# Altium PCB SoderStation.PcbDoc
Units mm, origin at the board's own origin, x right, y up, seen from the top; angles counter-clockwise.
Board outline 100 x 50 mm, 2 copper layers (Top Layer, Bottom Layer); 48 components, 33 nets, 146 pads, 5 vias.
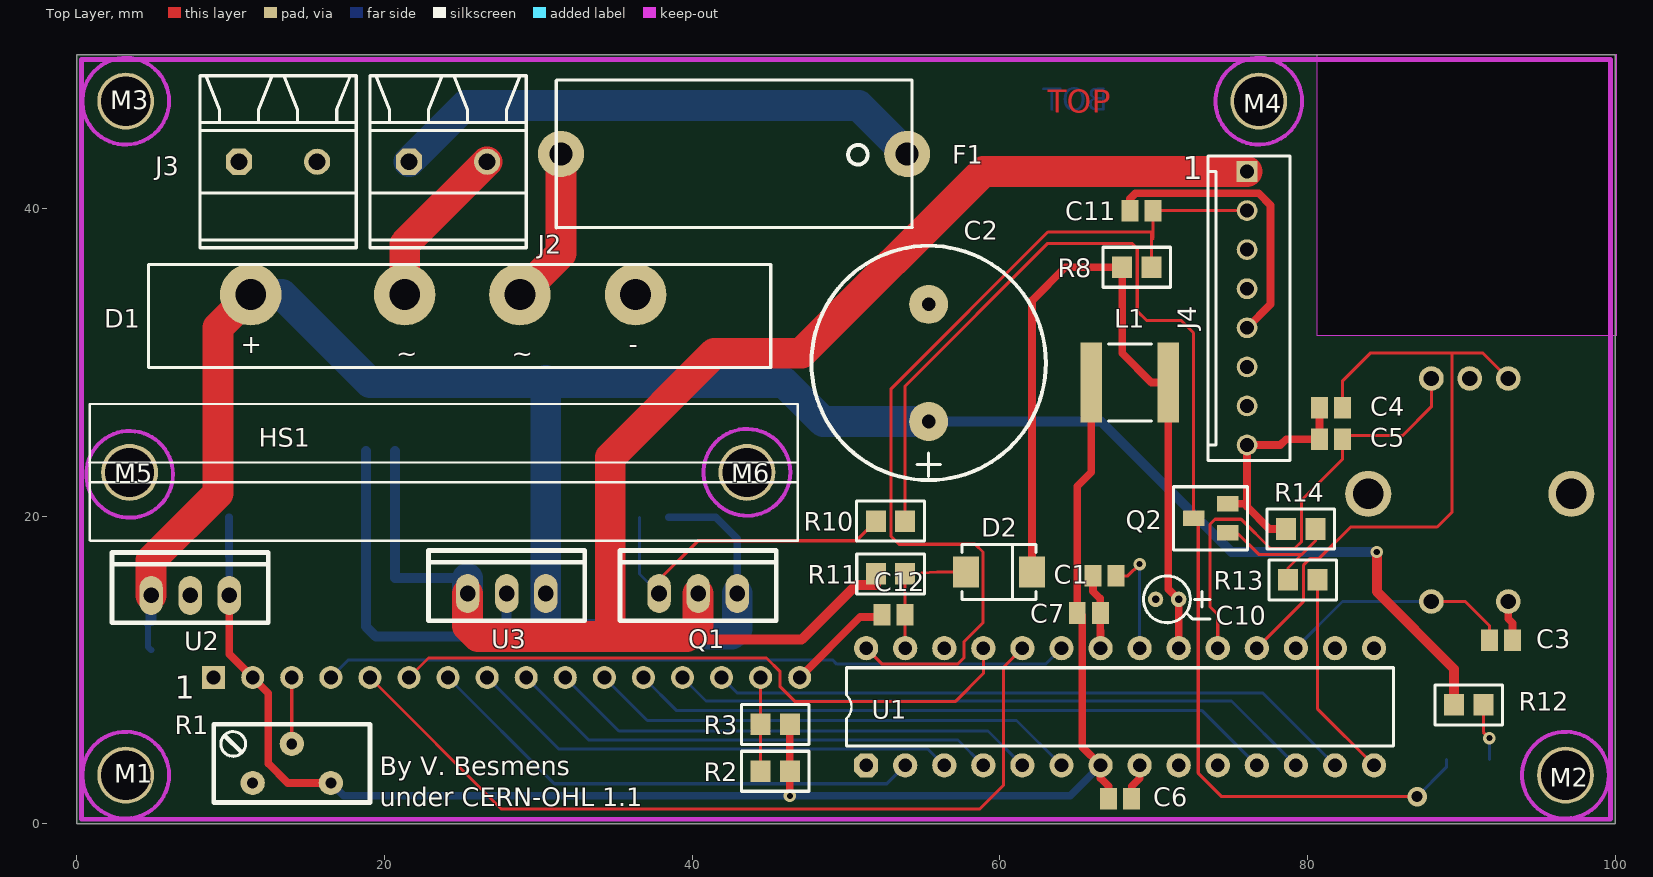
[diagram p0: Top Layer view]
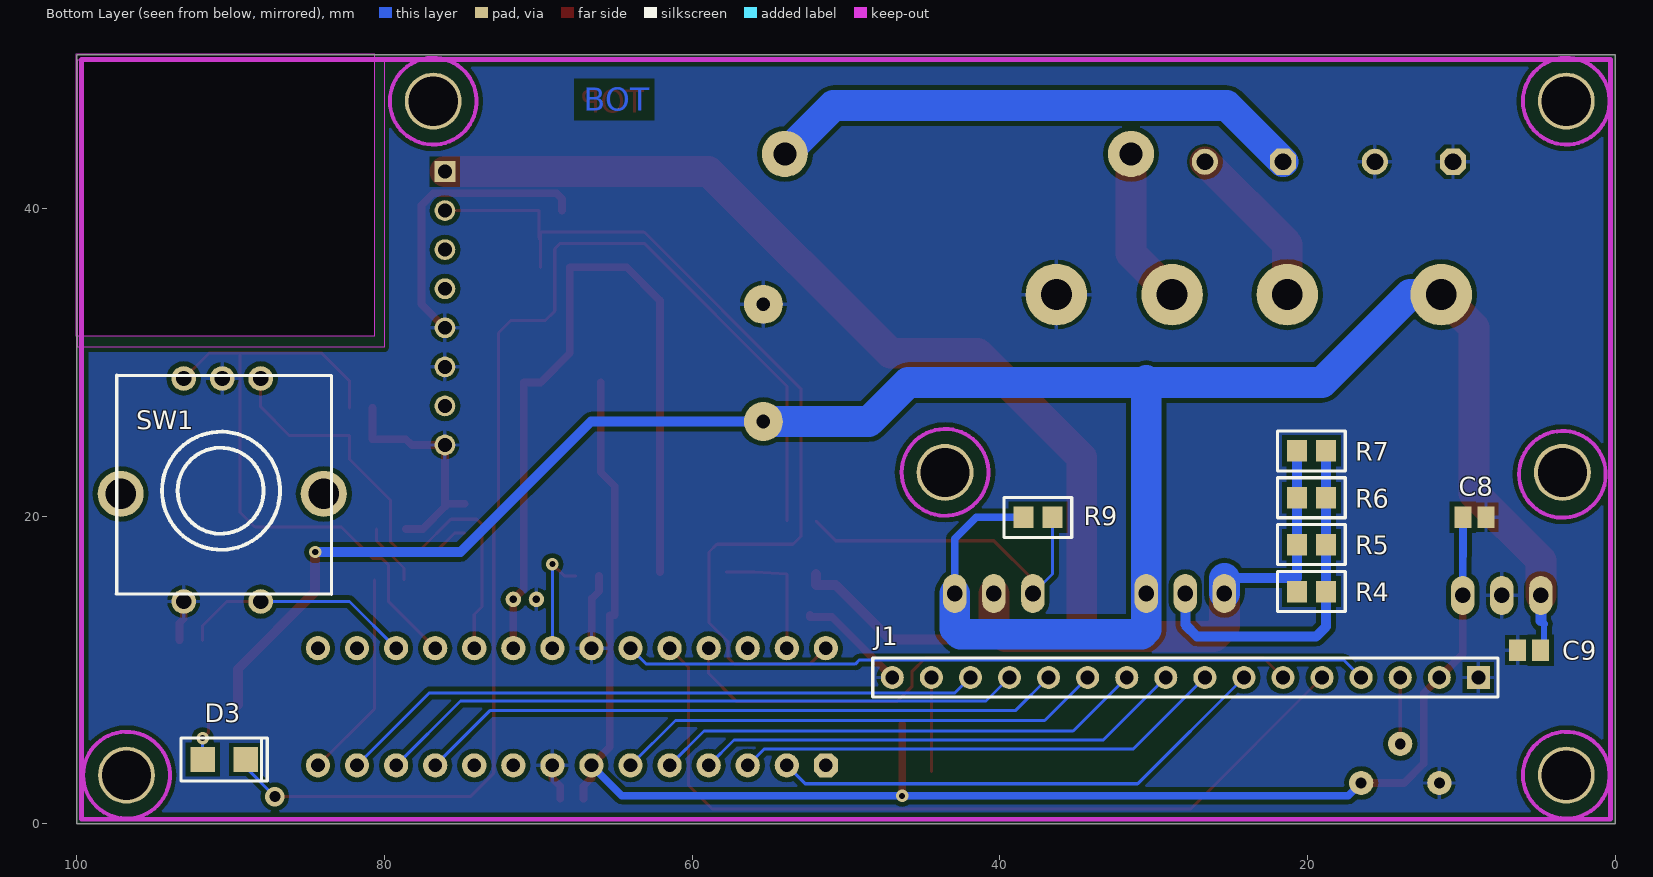
[diagram p1: Bottom Layer view, seen from below]
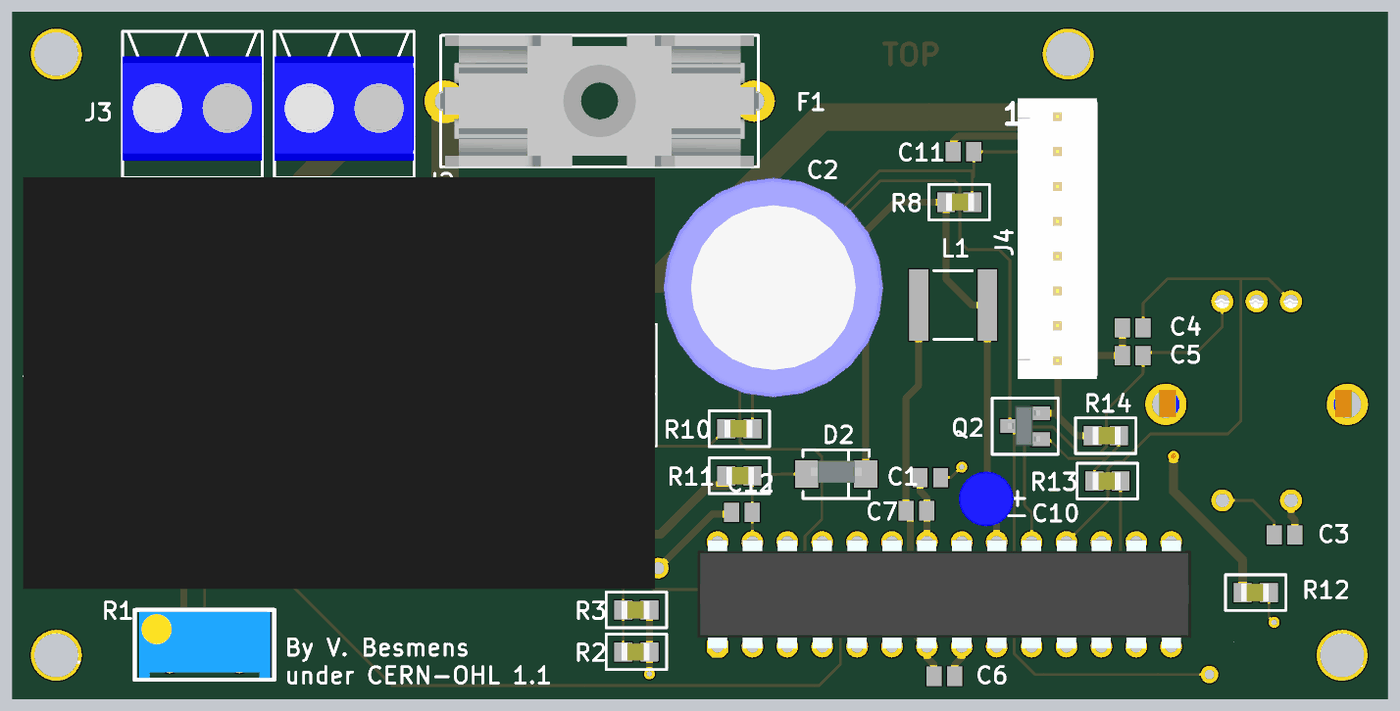
[diagram p2: 3D render of the assembled board from above, using the file's embedded part models]
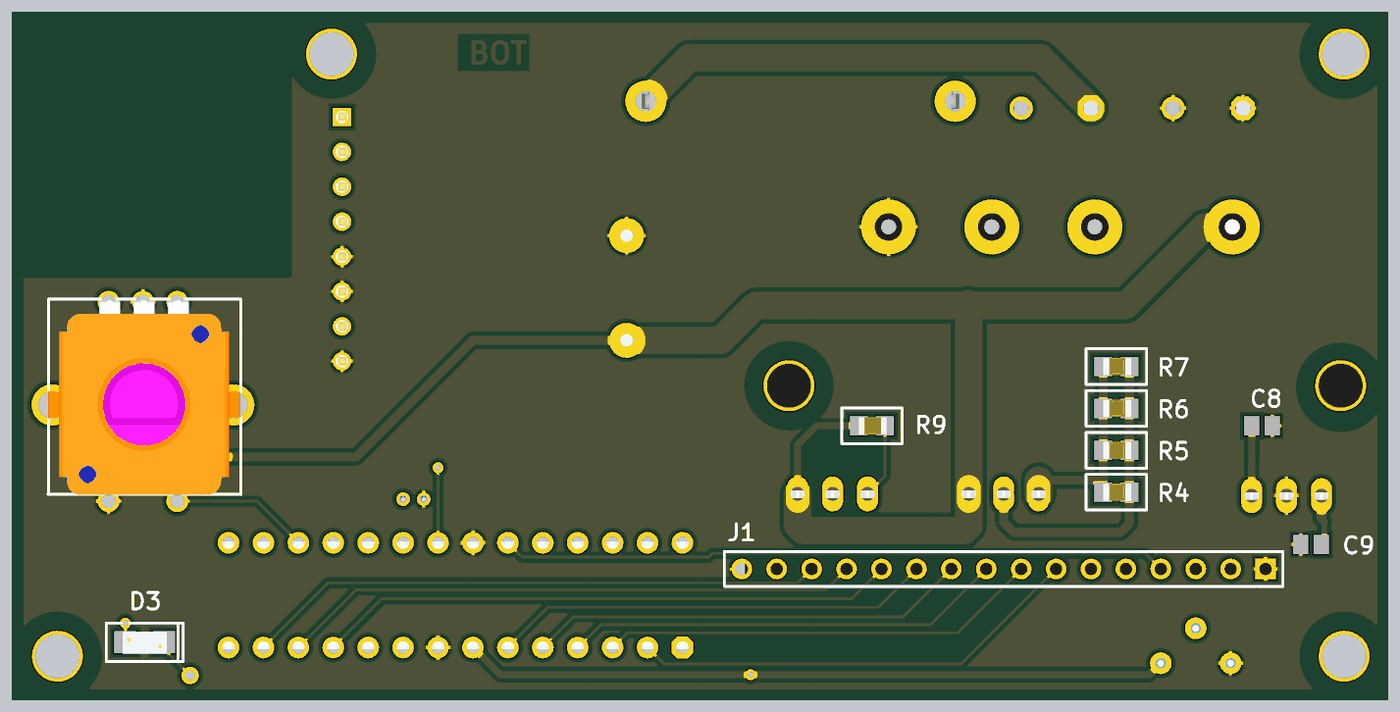
[diagram p3: 3D render of the assembled board from below, using the file's embedded part models]

## Layer stack, top to bottom
Top Layer: signal copper 0.0356
Dielectric: dielectric 0.32, FR-4, Dk 4.8
Bottom Layer: signal copper 0.0356

## Board outline
0,0 100,0 100,50 0,50
cut-out: 100.076,50.038 100.076,31.75 80.645,31.75 80.645,50.038

## Design rules (kind name [scope] priority, off if disabled: settings)
Clearance ClearancePour [IsRegion] p1: gap=0.3
Clearance [All] p2: gap=0.15
ComponentClearance HSClearance [InComponent('HS1')] p1: gap=0 collisioncheckmode=3 verticalgap=0 showdistances=FALSE
ComponentClearance ComponentClearance_1 [All] p2: gap=0.254 collisioncheckmode=3 verticalgap=0.254 showdistances=FALSE
Height [All] p1 off: minheight=0 maxheight=25.4 prefheight=12.7
HoleSize [All] p1: absolutevalues=TRUE maxlimit=4 minlimit=0.4 maxpercent=80.000 minpercent=20.000
HoleToHoleClearance [All] p1 off: gap=0.254 allowstackedmicrovias=TRUE
MinimumSolderMaskSliver [All] p1 off: minsoldermaskwidth=0.254
PolygonConnect [All] p1: connectstyle=Relief reliefconductorwidth=0.254 reliefentries=4 polygonreliefangle="90 Angle" airgapwidth=0.254
RoutingVias [All] p1: holewidth=0.4 width=0.8 viastyle="Through Hole" minholewidth=0.711 minwidth=1.27 maxholewidth=0.711 maxwidth=1.27
SMDNeckDown [All] p1: percent=50.000
SilkToSilkClearance [All] p1 off: silktosilkclearance=0.254
SilkscreenOverComponentPads [All] p1 off: minsilkscreentomaskgap=0.254
SolderMaskExpansion [All] p1: expansion=0.102
Width Width24V [InNet('24V') or InNet('HEATER')] p1: maxlimit=5 minlimit=0.2 preferedwidth=2
Width WidthVCCGND [InNet(VCC) or InNet(GND) or InNet(AVCC)] p2: maxlimit=2 minlimit=0.5 preferedwidth=0.5
Width [All] p3: maxlimit=4 minlimit=0.15 preferedwidth=0.2
21 further rules are at their usual default settings.

## Components (designator, comment, footprint, x,y, rotation, side; value= is the part's Value field where it differs from the comment)
C1 "Cap Semi" C0805 66.802,16.129 r0 top
C2 "4700u 35V" RB-.3/.6 55.372,26.162 r270 top
C3 "Cap Semi" C0805 92.583,11.938 r180 top
C4 "Cap Semi" C0805 81.534,27.051 r0 top
C5 "Cap Semi" C0805 81.534,25.019 r0 top
C6 "Cap Semi" C0805 67.818,1.651 r180 top
C7 "Cap Semi" C0805 65.786,13.716 r180 top
C8 "Cap Semi" C0805 9.144,19.939 r0 bottom
C9 "Cap Semi" C0805 5.588,11.303 r180 bottom
C10 "10u" RBM-1.5/4.0 71.628,14.605 r180 top
C11 "Cap Semi" C0805 69.215,39.878 r0 top
C12 "Cap Semi" C0805 53.086,13.589 r0 top
D1 "B40C5000" BXXC5000 11.303,34.417 r0 top
D2 "MBRS120" D_SMB 59.944,16.383 r0 top
D3 "LED3MM" LED1206R 89.027,4.191 r0 bottom
F1 "4AT" FuseHolder 53.975,43.561 r180 top
HS1 "Heatsink" "Heatsink_VPR116 - L46" 46.863,27.305 r180 top
J1 "LCD" HDR1X16 8.89,9.525 r0 bottom
J2 "24V AC-IN" MKDS3_2RMI 21.59,43.053 r0 top
J3 "Earth GND" MKDS3_2RMI 10.541,43.053 r0 top
J4 "To Iron" PSS8G 76.073,42.418 r0 top
L1 "47u" 2220 68.453,28.702 r0 top
M1 "3.2mm" DRILL3_2MM 3.175,3.175 r0 top
M2 "3.2mm" DRILL3_2MM 96.774,3.175 r0 top
M3 "3.2mm" DRILL3_2MM 3.175,46.99 r0 top
M4 "3.2mm" DRILL3_2MM 76.835,46.99 r0 top
M5 "3.2mm" DRILL3_2MM 3.429,22.86 r0 top
M6 "3.2mm" DRILL3_2MM 43.561,22.86 r0 top
Q1 "IRF9530" TO-220-3VI 36.83,14.986 r0 top
Q2 "BC847C" SOT23 74.803,18.923 r90 top
R1 "1K" VR-7 16.51,3.937 r180 top
R2 "Res1" R0805 44.45,3.429 r0 top
R3 "Res1" R0805 44.45,6.477 r0 top
R4 "Res1" R0805 18.796,15.113 r0 bottom
R5 "Res1" R0805 18.796,18.161 r0 bottom
R6 "Res1" R0805 18.796,21.209 r0 bottom
R7 "Res1" R0805 18.796,24.257 r0 bottom
R8 "Res1" R0805 69.85,36.195 r180 top
R9 "Res1" R0805 36.576,19.939 r0 bottom
R10 "Res1" R0805 51.943,19.685 r0 top
R11 "Res1" R0805 53.848,16.256 r180 top
R12 "Res1" R0805 89.535,7.747 r0 top
R13 "Res1" R0805 78.74,15.875 r0 top
R14 "Res1" R0805 80.518,19.177 r180 top
SW1 "ALPS STEC12E" ALPS_STEC12E08 97.155,21.463 r180 bottom
U1 "ATmega8-16PI" DIP-28S 51.308,3.81 r90 top
U2 "MC78S05ACT" TO-220-3VI 3.81,14.859 r0 top
U3 "LM317T" TO-220-3VI 24.384,14.986 r0 top

## Footprints (in the part's own frame and the unit in brackets; to place one, negate y for a bottom-side part, rotate by r counter-clockwise, add the part's x,y. Pads: shape width x height; smd on the part's side, far side on the other; paste and mask are expansions set on the pad)
2220 [mm] "Chip Capacitor, Body 5.7x5.0mm, IPC High Density"
  rect 1.4x5.2 smd: 1(-2.5,0) 2(2.5,0)
  silkscreen extent -1.4,-2.5 1.4,2.5, body extent -2.95,-2.63 2.95,2.63, height 1.4
ALPS_STEC12E08 [mm] "Rotary Encoder THD"
  round 1.6 hole 1: A(9.1,7.5) B(4.1,7.5) C(6.6,7.5) SW1(4.1,-7) SW2(9.1,-7)
  round 3 hole 2: M1(0,0) M2(13.208,0)
  silkscreen extent -0.3,-6.53 13.72,7.72, body extent -0.32,-6.55 13.68,7.7, height 20.2
BXXC5000 [mm] "Rectifier 5A"
  round 4 hole 2: 1(0,0) 2(10.008,0) 3(25.019,0) 4(17.5,0)
  silkscreen extent -6.65,-4.75 33.83,1.96, body extent -6.69,-4.8 33.81,1.9, height 22.82
C0805 [mm] "Chip Capacitor, Body 2.0x1.3mm, IPC High Density"
  rect 1.1x1.4 smd: 1(-0.75,0) 2(0.75,0)
  body extent -1.1,-0.72 1.1,0.72, height 1.4
D_SMB [mm]
  rect 1.7x2 smd: 1(-2.15,0) 2(2.15,0)
  silkscreen extent -2.41,-1.78 2.41,1.78, body extent -1.85,-0.64 1.85,0.97, height 1.15
DIP-28S [mil]
  oct 62x62 hole 35: 1(0,0)
  round 62 hole 35: 2(0,-100) 3(0,-200) 4(0,-300) 5(0,-400) 6(0,-500) 7(0,-600) 8(0,-700) 9(0,-800) 10(0,-900) 11(0,-1000) 12(0,-1100) 13(0,-1200) 14(0,-1300) 15(300,-1300) 16(300,-1200) 17(300,-1100) 18(300,-1000) 19(300,-900) 20(300,-800) 21(300,-700) 22(300,-600) 23(300,-500) 24(300,-400) 25(300,-300) 26(300,-200) 27(300,-100) 28(300,0)
  silkscreen extent 50,-1350 250,50, body extent -5,-1357 305,57, height 183
DRILL3_2MM [mm]
  round 3.7 hole 3.2: 1(0,0)
FuseHolder [mm] "Schurter OGN Fuse Holder"
  round 3 hole 1.5: 1(0,0) 2(22.504,0)
  silkscreen extent -0.33,-4.8 22.81,4.8, body extent -0.3,-4.81 22.8,4.79, height 11.5
HDR1X16 [mm] "Connector; Header; 16 Position"
  rect 1.5x1.5 hole 0.9: 1(0,0)
  round 1.5 hole 0.9: 2(2.54,0) 3(5.08,0) 4(7.62,0) 5(10.16,0) 6(12.7,0) 7(15.24,0) 8(17.78,0) 9(20.32,0) 10(22.86,0) 11(25.4,0) 12(27.94,0) 13(30.48,0) 14(33.02,0) 15(35.56,0) 16(38.1,0)
  silkscreen extent -1.27,-1.27 39.37,1.27
"Heatsink_VPR116 - L46" [mm] "ALUTronic VPR116 Length 46"
  silkscreen extent 0,0 46.08,8.89, body extent 0.1,-10.71 46.1,19.29, height 31
LED1206R [mm]
  rect 1.6x1.6 smd: 1(2.8,0) 2(0,0)
  silkscreen extent -1.4,-1.4 4.2,1.4, body extent -0.2,-0.76 3,0.84, height 1.11
MKDS3_2RMI [mm]
  oct 1.7x1.7 hole 1.1: 1(0,0)
  round 1.7 hole 1.1: 2(5.08,0)
  silkscreen extent -2.54,-5.59 7.62,5.59, body extent -2.54,-3.81 7.62,3.79, height 10
PSS8G [mm]
  rect 1.351x1.351 hole 0.9: 1(0,0)
  round 1.351 hole 0.9: 2(0,-2.54) 3(0,-5.08) 4(0,-7.62) 5(0,-10.16) 6(0,-12.7) 7(0,-15.24) 8(0,-17.78)
  silkscreen extent -2.54,-18.8 2.79,1.02, body extent -2.92,-19.11 2.88,1.33, height 11.25
R0805 [mm]
  rect 1.3x1.4 smd: 1(0,0) 2(1.9,0)
  silkscreen extent -1.25,-1.3 3.15,1.3, body extent -0.12,-0.64 1.9,0.64, height 0.61
RB-.3/.6 [mil]
  round 100 hole 35: 1(0,0) 2(-300,0)
  silkscreen extent -450,-300 150,300, body extent -465,-315 165,315, height 1024
RBM-1.5/4.0 [mm]
  round 1 hole 0.5: 1(0,0) 2(1.5,0)
  silkscreen extent -2.03,-1.52 2.28,1.52, body extent -1.24,-1.97 2.76,2.03, height 7.1
SOT23 [mm]
  rect 1x1.4 smd: 1(0,0) 2(1.9,0) 3(0.95,2.2)
  silkscreen extent -1.1,-1.3 3,3.5, body extent -0.49,0 2.41,2.37, height 1
TO-220-3VI [mil]
  oval 60x100 hole 40: 1(40,0) 2(140,0) 3(240,0)
  silkscreen extent -60,-70 340,110, body extent -81,-60 361,125, height 958
VR-7 [mil]
  round 62 hole 28: 1(0,50) 2(100,-50) 3(200,50)
  silkscreen extent -100,-100 300,100, body extent -88,-95 288,95, height 455

## Part data
C1 C3 C4 C5 C6 C7 C8 C9 C11 C12: "Capacitor (Semiconductor SIM Model)"
C2 C10: library part "Cap Pol3", "Polarized Capacitor (Surface Mount)"
D1: library part Bridge1, "Full Wave Diode Bridge"
D2: library part "D Schottky", "Schottky Diode"
D3: library part LED0, "Typical INFRARED GaAs LED"
F1: library part "Fuse 1", "Fuse"
HS1: "Heatsink Symbol"
J1: library part "Header 16", "Header, 16-Pin"
J2 J3: library part "Header 2", "Header, 2-Pin"
J4: library part "Header 8", "Header, 8-Pin"
L1: library part Inductor, "Inductor"
M1 M2 M3 M4 M5 M6: library part MountingHole, "Mounting Hole"
Q1: "HEXFET P-Channel Power MOSFET"
Q2: "NPN General-purpose Transistor"
R1: library part "RPot SM", "Square Trimming Potentiometer"
R2 R3 R4 R5 R6 R7 R8 R9 R10 R11 R12 R13 R14: "Resistor"
SW1: library part RotaryEncoder
U1: "8-Bit AVR Microcontroller with 8K Bytes of In-System Programmable Flash Memory"
U2: library part MC7805ACT, "3-Terminal Positive Fixed Voltage Regulator"
U3: "3-Terminal Adjustable Positive Voltage Regulator"

## Via types
v1: diameter 0.8, hole 0.4, Top Layer to Bottom Layer, 4 vias
v2: diameter 1.27, hole 0.711, Top Layer to Bottom Layer, 1 vias

## Nets (pads, with @x,y where several pads share a name; then routed paths per layer and width w, separated by ;. In a path a pad name is that pad's centre, name@x,y a point inside that pad or via, vN(x,y) a via of type N, cw(c..) or ccw(c..) an arc to the next point about the centre after c; other vN are vias at no path point)
24V: C2.1 C9.2 D1.1 Q1.3 R9.2 R12.1 U2.1 U3.3 | length 157.8
  Top Layer w0.65: v1(84.506,17.678) 84.506,15.113 89.535,10.084 R12.1
  Top Layer w2: U2.1 4.826,17.145 9.169,21.488 9.169,32.283 D1.1
  Bottom Layer w0.4: 4.623,13.005 4.623,11.518 C9.2
  Bottom Layer w0.5: 4.623,13.005 4.826,13.208 ; R9.2 41.529,19.939 42.926,18.542 Q1.3
  Bottom Layer w0.65: C2.1 66.573,26.162 75.057,17.678 v1(84.506,17.678)
  Bottom Layer w0.7: 4.826,13.208 U2.1
  Bottom Layer w2: D1.1 13.335,34.417 19.05,28.702 30.353,28.702 ; Q1.3 42.926,12.7 42.558,12.332 30.797,12.332 30.48,12.649 U3.3 30.48,28.829 30.607,28.702 45.974,28.702 48.514,26.162 C2.1
AVCC: C10.1 D2.2 L1.2 R8.2 U1.20 | length 51.3
  Top Layer w0.5: D2.2 62.094,34.027 64.262,36.195 R8.2 67.95,30.607 69.855,28.702 L1.2 70.953,15.28 C10.1 U1.20
GND: C1.1 C2.2 C3.1 C4.1 C5.1 C6.1 C7.1 C8.1 C9.1 C10.2 C11.1 C12.1 D1.3 J1.1 J1.16 J3.1 J3.2 J4.5 J4.6 J4.8 Q2.2 R1.3 R14.2 SW1.C SW1.SW1 U1.8 U1.22 U2.2 | length 50.9
  Top Layer w0.5: J1.16 50.927,13.462 52.336,13.462 C12.1 ; C1.1 66.052,15.14 66.536,14.656 C7.1 66.536,12.56 66.548,12.548 U1.22 ; C11.1 68.465,40.64 68.821,40.996 76.835,40.996 77.597,40.234 77.597,33.782 J4.5 ; C6.1 68.568,2.464 69.088,2.984 U1.8 ; Q2.2 75.87,20.823 ; 76.073,20.62 77.516,19.177 R14.2 ; 76.073,20.823 J4.8 78.232,24.638 78.613,25.019 C5.1 C4.1 ; SW1.SW1 93.055,13.334 93.333,13.056 C3.1
HEATER: J4.1 Q1.2 R4.2 R5.2 R6.2 R7.2 R11.2 U3.1 | length 109.4
  Top Layer w0.65: 39.649,12.192 40.386,12.929 40.386,12.383 40.78,11.989 47.117,11.989 50.673,15.545 51.948,15.545 R11.2
  Top Layer w2: U3.1 25.4,12.865 26.073,12.192 34.798,12.192 34.671,12.319 34.671,23.838 41.44,30.607 47.117,30.607 58.928,42.418 J4.1 ; 34.417,12.192 39.649,12.192 ; 40.386,12.929 Q1.2
  Bottom Layer w0.65: R7.2 R6.2 R5.2 20.696,15.982 U3.1@25.4,15.982
  Bottom Layer w2: U3.1 U3.1@25.4,15.982
LCD_D0: J1.7 U1.2 | length 33.1
  Bottom Layer w0.2: J1.7 31.039,2.616 52.654,2.616 U1.2
LCD_D1: J1.8 U1.3 | length 32.1
  Bottom Layer w0.2: J1.8 31.318,4.877 55.321,4.877 U1.3
LCD_D2: J1.9 U1.4 | length 32.1
  Bottom Layer w0.2: J1.9 33.274,5.461 57.277,5.461 U1.4
LCD_D3: J1.10 U1.5 | length 32.1
  Bottom Layer w0.2: J1.10 35.23,6.045 59.233,6.045 U1.5
LCD_D4: J1.11 U1.6 | length 32.1
  Bottom Layer w0.2: J1.11 37.084,6.731 61.087,6.731 U1.6
LCD_D5: J1.12 U1.11 | length 42.2
  Bottom Layer w0.2: J1.12 38.989,7.366 73.152,7.366 U1.11
LCD_D6: J1.13 U1.12 | length 42.2
  Bottom Layer w0.2: J1.13 40.894,8.001 75.057,8.001 U1.12
LCD_D7: J1.14 U1.13 | length 42.2
  Bottom Layer w0.2: J1.14 42.91,8.525 77.073,8.525 U1.13
LCD_EN: J1.6 U1.25 | length 42
  Top Layer w0.2: J1.6 22.86,10.795 44.831,10.795 45.72,9.906 45.72,8.915 46.66,7.976 57.125,7.976 58.928,9.779 U1.25
LCD_RS: J1.4 U1.23 | length 48.5
  Bottom Layer w0.2: J1.4 17.653,10.668 49.124,10.668 49.403,10.389 62.967,10.389 U1.23
LCD_RW: J1.5 U1.24 | length 54.8
  Top Layer w0.2: J1.5 27.61,0.965 58.674,0.965 60.249,2.54 60.249,10.211 U1.24
NetC1_2: C1.2 U1.21 | length 7.3
  Top Layer w0.2: C1.2 68.325,16.129 v1(69.088,16.892)
  Bottom Layer w0.2: U1.21 v1(69.088,16.892)
NetD1_2: D1.2 J2.2 | length 10.9
  Top Layer w2: D1.2 21.311,37.694 J2.2
NetD1_4: D1.4 F1.2 | length 10.2
  Top Layer w2: D1.4 31.471,37.085 F1.2
NetD3_1: D3.1 R12.2 | length 3.7
  Top Layer w0.2: R12.2 91.435,5.974 v1(91.827,5.582)
  Bottom Layer w0.2: D3.1 v1(91.827,5.582)
NetD3_2: D3.2 Q2.3 R10.2 | length 83
  Top Layer w0.2: R10.2 53.843,28.473 63.114,37.744 68.58,37.744 68.936,37.389 68.936,33.337 69.532,32.741 71.78,32.741 72.593,31.928 72.593,19.873 Q2.3 72.898,19.578 72.898,3.302 74.422,1.778 v2(87.122,1.778)
  Bottom Layer w0.2: v2(87.122,1.778) 89.027,3.683 D3.2
NetF1_1: F1.1 J2.1 | length 35.2
  Bottom Layer w2: J2.1 25.248,46.711 50.825,46.711 F1.1
NetJ1_3: J1.3 R1.2 | length 4.3
  Top Layer w0.2: R1.2 J1.3
NetJ1_15: J1.15 R2.1 R3.1 | length 6.1
  Top Layer w0.2: R2.1 R3.1 J1.15
NetQ1_1: Q1.1 R9.1 R10.1 | length 22
  Top Layer w0.2: Q1.1 37.846,15.875 40.386,18.415 50.673,18.415 R10.1
  Bottom Layer w0.2: R9.1 36.576,16.256 Q1.1
NetQ2_1: Q2.1 R13.1 R14.1 | length 9.4
  Top Layer w0.2: Q2.1 75.438,18.923 76.835,17.526 79.629,17.526 ; R13.1 78.74,16.637 80.518,18.415 R14.1
NetR4_1: R4.1 R5.1 R6.1 R7.1 U3.2 | length 23.2
  Bottom Layer w0.65: R7.1 R6.1 R5.1 R4.1 18.796,12.827 19.431,12.192 27.178,12.192 27.94,12.954 U3.2
RA: C5.2 SW1.A U1.19 | length 31.7
  Top Layer w0.2: U1.19 74.168,13.614 73.66,14.122 73.66,19.482 73.99,19.812 75.692,19.812 77.597,17.907 79.162,17.907 79.618,18.363 79.618,21.058 82.284,23.724 C5.2 82.284,25.248 86.182,25.248 88.055,27.12 SW1.A
RB: C4.2 SW1.B U1.18 | length 42
  Top Layer w0.2: U1.18 79.731,14.453 79.731,16.815 80.188,17.272 80.772,17.272 82.804,19.304 88.43,19.304 89.408,20.282 89.408,30.582 ; C4.2 82.284,28.817 84.074,30.607 91.411,30.607 SW1.B
RSENS: C11.2 J4.2 R8.1 U1.28 | length 61.8
  Top Layer w0.2: U1.28 52.349,10.389 57.252,10.389 57.658,10.795 57.658,11.836 58.903,13.081 58.903,17.678 58.395,18.186 53.442,18.186 52.934,18.694 52.934,28.296 63.119,38.481 69.85,38.481 69.85,37.973 ; R8.1 69.85,37.973 ; J4.2 C11.2 69.965,38.088 69.85,37.973
RSW: C3.2 SW1.SW2 U1.17 | length 15.4
  Top Layer w0.2: SW1.SW2 90.261,14.463 91.833,12.891 C3.2
  Bottom Layer w0.2: U1.17 82.281,14.463 SW1.SW2
SCURRENT: C12.2 D2.1 R11.1 U1.27 | length 8.8
  Top Layer w0.2: U1.27 53.848,12.497 53.836,12.509 C12.2 53.836,14.91 53.848,14.922 R11.1 55.931,16.383 D2.1
SPWM: R13.2 U1.14 | length 13.6
  Top Layer w0.2: R13.2 80.64,7.498 U1.14
VCC: C6.2 C7.2 C8.2 J1.2 L1.1 R1.1 R2.2 R3.2 U1.7 U2.3 | length 106
  Top Layer w0.5: U2.3 9.906,11.049 J1.2 12.446,8.509 12.446,3.937 13.716,2.667 R1.1 ; v1(46.35,1.829) R2.2 R3.2 ; L1.1 65.953,22.875 65.036,21.958 C7.2 65.036,13.564 65.354,13.564 65.354,5.004 U1.7 66.548,2.984 67.068,2.464 C6.2
  Bottom Layer w0.5: C8.2 9.894,17.411 9.906,17.399 U2.3 ; R1.1 17.348,1.829 v1(46.35,1.829) 64.567,1.829 U1.7
pads on no net: J4.3 J4.4 J4.7 M1.1 M2.1 M3.1 M4.1 M5.1 M6.1 SW1.M1 SW1.M2 U1.1 U1.9 U1.10 U1.15 U1.16 U1.26

## Polygon pours and split planes (outlines as drawn)
GND on Bottom Layer "Bottom Layer-No Net" (solid, remove dead copper, pour order 2): 0.3,49.7 80.391,49.7 80.391,31.242 99.7,31.242 99.7,0.3 0.3,0.3 0.3,49.7

## Keep-outs
Bottom Layer:
  rectangle: 80.01,30.988 99.949,49.7
Keep-Out Layer:
  circle w0.254: c3.175,46.99 r2.82
  circle w0.254: c3.175,3.175 r2.82
  circle w0.254: c96.774,3.175 r2.82
  circle w0.254: c76.835,46.99 r2.82
  circle w0.254: c43.561,22.86 r2.82
  circle w0.254: c3.429,22.733 r2.82
  lines w0.3: 0.3,0.3 99.7,0.3 99.7,49.7 0.3,49.7 0.3,0.3

## Other copper
Top Layer:
  text "TOP" at 63.119,46.228 h1.5
Bottom Layer:
  text "BOT" at 67.056,46.355 h1.5

## Silkscreen, mask and mechanical layers (free items; w line width, h text height)
Top Overlay:
  lines w0.2: 72.136,13.716 72.517,13.335 73.66,13.335
  text "1" at 71.882,41.91 h1.5
  text "1" at 6.35,8.128 h1.5
  text "By V. Besmens" at 19.685,3.175 h1.2
  text "under CERN-OHL 1.1" at 19.685,1.143 h1.2
Mechanical 30:
  lines w0.2: 0.3,0.3 0.3,0.381 0.3,49.7 99.7,49.7 99.7,49.53 99.7,0.3 0.3,0.3

## Text inside footprints (layer, text, board x,y; h text height)
D1: Top Overlay "-" at 35.865,30.607 h1.2; Top Overlay "~" at 28.27,29.997 h1.2; Top Overlay "~" at 20.752,29.997 h1.2; Top Overlay "+" at 10.668,30.607 h1.2